# Altium PCB zegar_st.PcbDoc
Units mm, origin at the board's own origin, x right, y up, seen from the top; angles counter-clockwise.
Board outline 26 x 26 mm, 2 copper layers (Top Layer, Bottom Layer); 1 components, 3 nets, 9 pads, 3 vias.
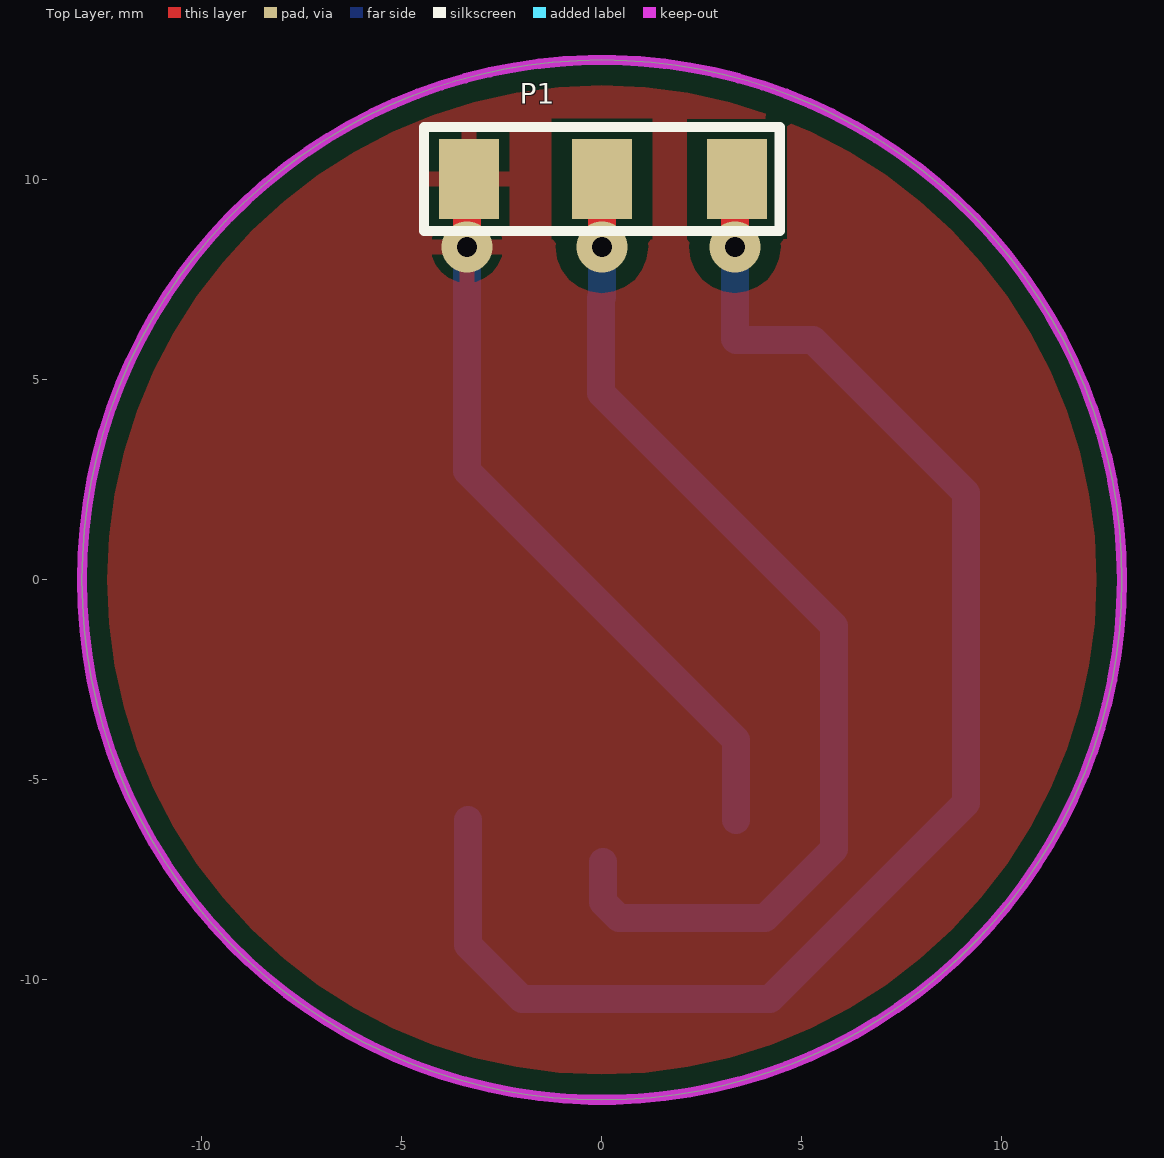
[diagram p0: Top Layer view]
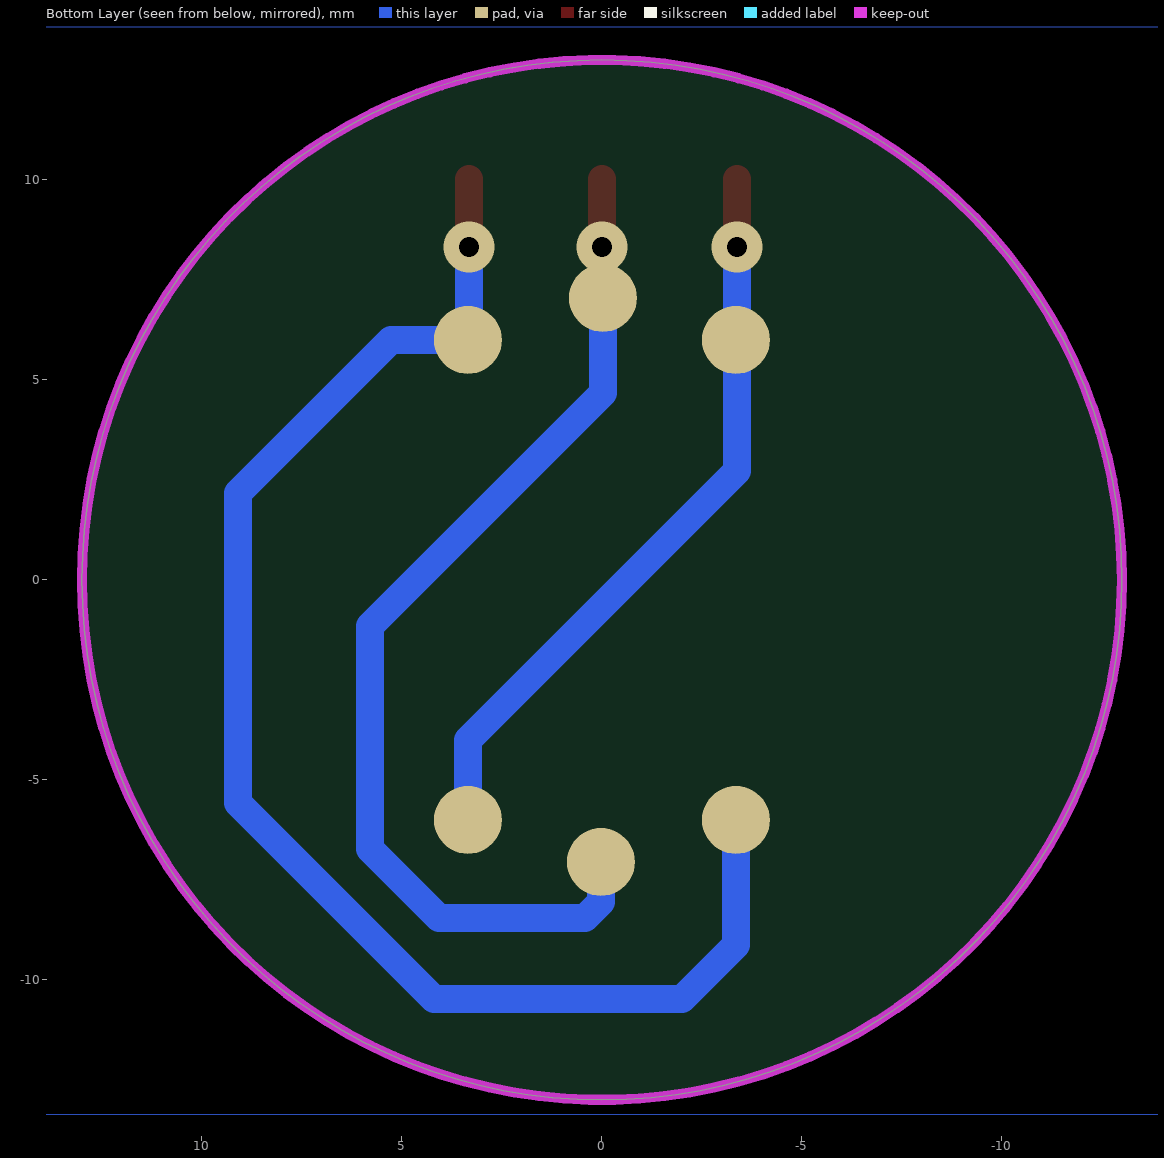
[diagram p1: Bottom Layer view, seen from below]

## Layer stack, top to bottom
Top Layer: signal copper 0.0356
Dielectric: dielectric 0.32, FR-4, Dk 4.8
Bottom Layer: signal copper 0.0356

## Board outline
0,-13 cw(c0,0) -13,0 cw(c0,0) 0,13 cw(c0,0) 13,0 cw(c0,0)

## Design rules (kind name [scope] priority, off if disabled: settings)
Clearance [All] p1: gap=0.508
PlaneConnect [All] p1: planeconnectstyle=Relief reliefexpansion=0.508 reliefentries=4 reliefconductorwidth=0.381 reliefairgap=0.254
PolygonConnect [All] p1: connectstyle=Relief reliefconductorwidth=0.381 reliefentries=4 polygonreliefangle="90 Angle" airgapwidth=0.254
RoutingVias [All] p1: holewidth=0.711 width=1.27 viastyle="Through Hole" minholewidth=0.5 minwidth=0.6 maxholewidth=1 maxwidth=3
SolderMaskExpansion [All] p1: expansion=0.102
Width [All] p1: maxlimit=1.27 minlimit=0.254 preferedwidth=0.254
27 further rules are at their usual default settings.

## Components (designator, comment, footprint, x,y, rotation, side; value= is the part's Value field where it differs from the comment)
P1 "Header 3" 3SMD 0,10.025 r0 top

## Footprints (in the part's own frame and the unit in brackets; to place one, negate y for a bottom-side part, rotate by r counter-clockwise, add the part's x,y. Pads: shape width x height; smd on the part's side, far side on the other; paste and mask are expansions set on the pad)
3SMD [mm]
  rect 1.5x2 smd: 1(-3.325,0) 2(0,0) 3(3.375,0)
  silkscreen extent -4.44,-1.3 4.44,1.3

## Part data
P1: "Header, 3-Pin"

## Free pads (board coordinates)
  round 1.7 smd far side: 1(-3.35,6) 1(3.35,-6) 2(-0.025,7.05) 2(0.025,-7.05) 3(-3.35,-6) 3(3.35,6)

## Via types
v1: diameter 1.27, hole 0.5, Top Layer to Bottom Layer, 3 vias

## Nets (pads, with @x,y where several pads share a name; then routed paths per layer and width w, separated by ;. In a path a pad name is that pad's centre, name@x,y a point inside that pad or via, vN(x,y) a via of type N, cw(c..) or ccw(c..) an arc to the next point about the centre after c; other vN are vias at no path point)
AGND: P1.1 pad.1 | length 18.8
  Top Layer w0.7: v1(-3.375,8.325) P1.1@-3.375,10.025
  Bottom Layer w0.7: v1(-3.375,8.325) -3.375,2.725 3.35,-4 pad.1@3.35,-6
BAT: P1.2 pad.2 | length 26.8
  Top Layer w0.7: v1(0,8.325) P1.2
  Bottom Layer w0.7: v1(0,8.325) 0,7.075 -0.025,7.05 -0.025,4.675 5.8,-1.15 5.8,-6.725 4.075,-8.45 0.425,-8.45 0.025,-8.05 pad.2@0.025,-7.05
NetP1_3: P1.3 pad.3 | length 37.3
  Top Layer w0.7: v1(3.325,8.325) P1.3@3.325,10.025
  Bottom Layer w0.7: pad.3@-3.35,-6 -3.35,-9.125 -2,-10.475 4.2,-10.475 9.1,-5.575 9.1,2.175 5.275,6 3.35,6 3.325,6.025 v1(3.325,8.325)

## Polygon pours and split planes (outlines as drawn)
no net on Bottom Layer "GND_TOP" (solid, remove dead copper, pour order 13): -15.125,-13.375 15.275,-13.375 15.275,13.825 15.05,13.825 -15.15,13.825 -15.15,-13.35
AGND on Top Layer "GND_BOTTOM" (solid, remove dead copper, pour order 13): -15.125,-13.375 15.275,-13.375 15.275,13.825 15.05,13.825 -15.15,13.825 -15.15,-13.35

## Keep-outs
Keep-Out Layer:
  circle w0.254: c0,0 r13

## Silkscreen, mask and mechanical layers (free items; w line width, h text height)
Mechanical 4:
  lines w0.254: -9.192,-9.192 9.192,9.192 -9.192,-9.192

## Dimensions
0,10 to 0,13 on Mechanical 4
0,10 to 3.375,10 on Mechanical 4
0,0 to 12.325,10.075 on Mechanical 4